# Altium PCB ar_pcb.PcbDoc
Units mil, origin at the board's own origin, x right, y up, seen from the top; angles counter-clockwise.
Board outline 10000 x 3699.85 mil, 6 copper layers (Top Layer, Power, I2C, UART, Ground, Bottom Layer), stack 32.112 mil thick; 11 components, 11 nets, 76 pads, 2 vias.
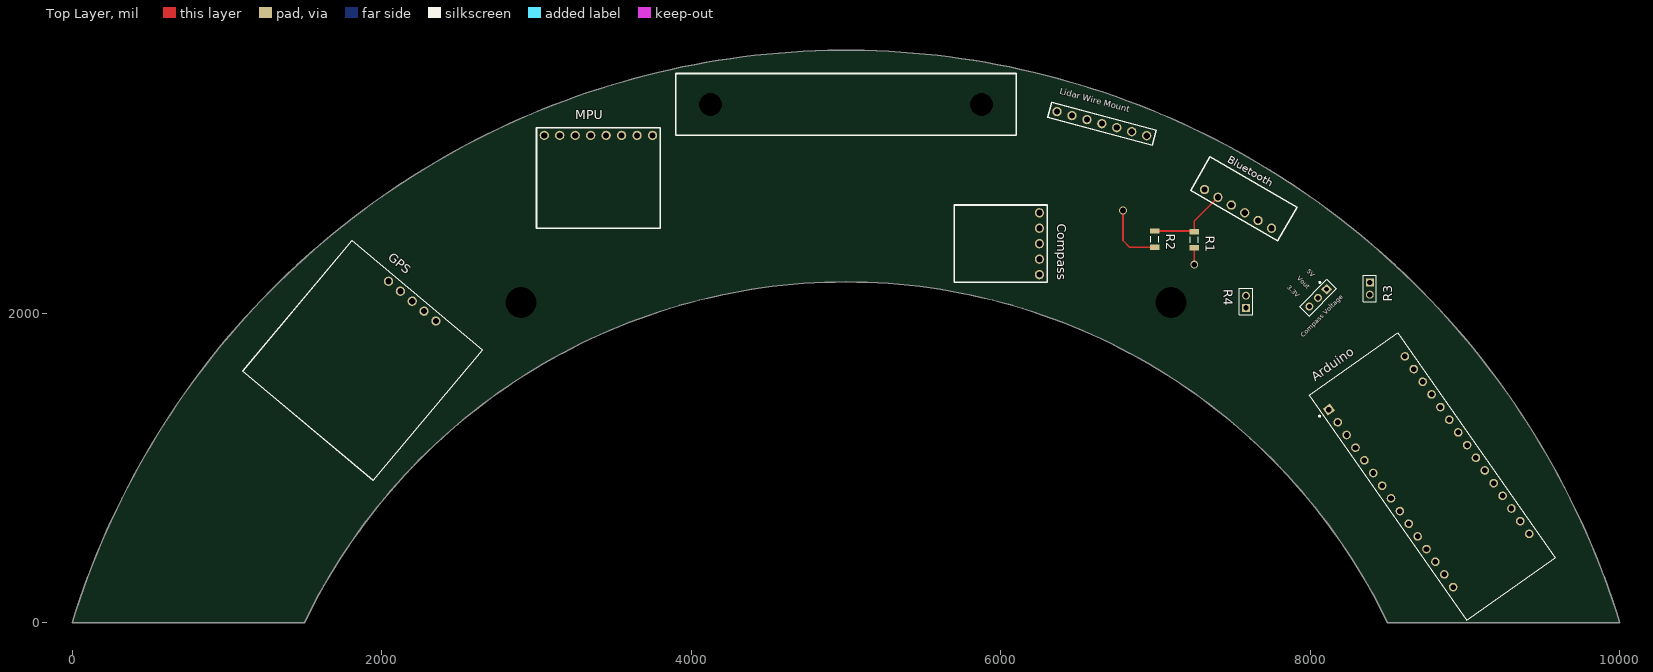
[diagram p0: Top Layer view]
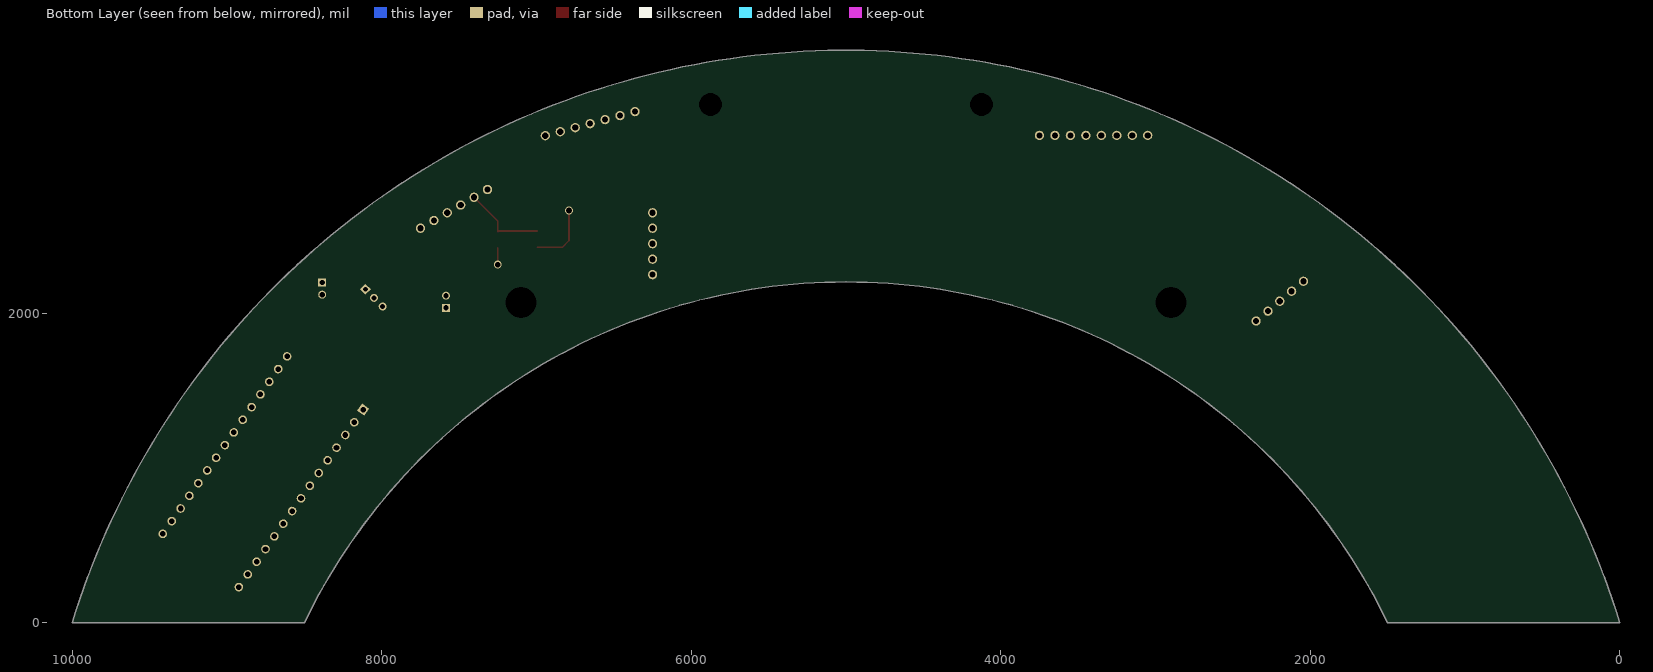
[diagram p1: Bottom Layer view, seen from below]
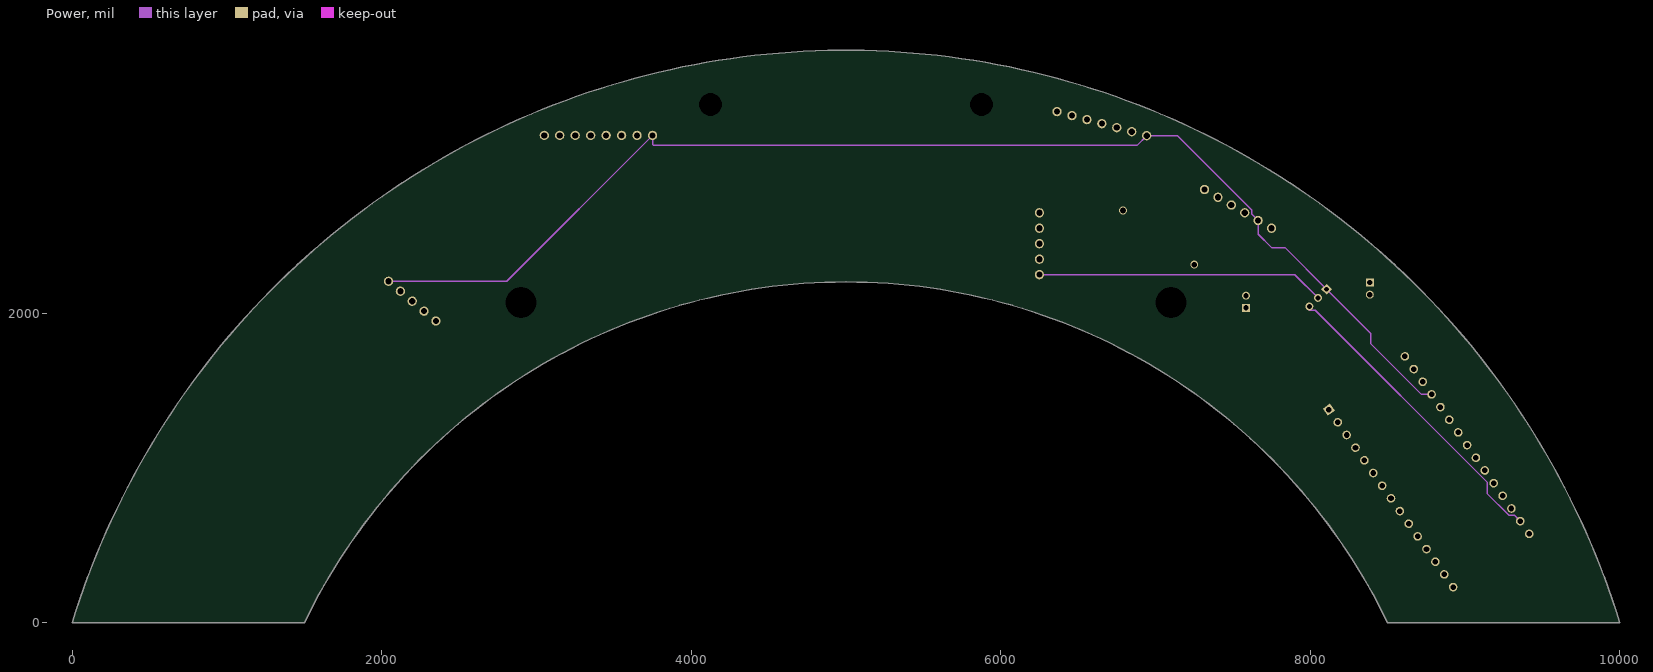
[diagram p2: Power]
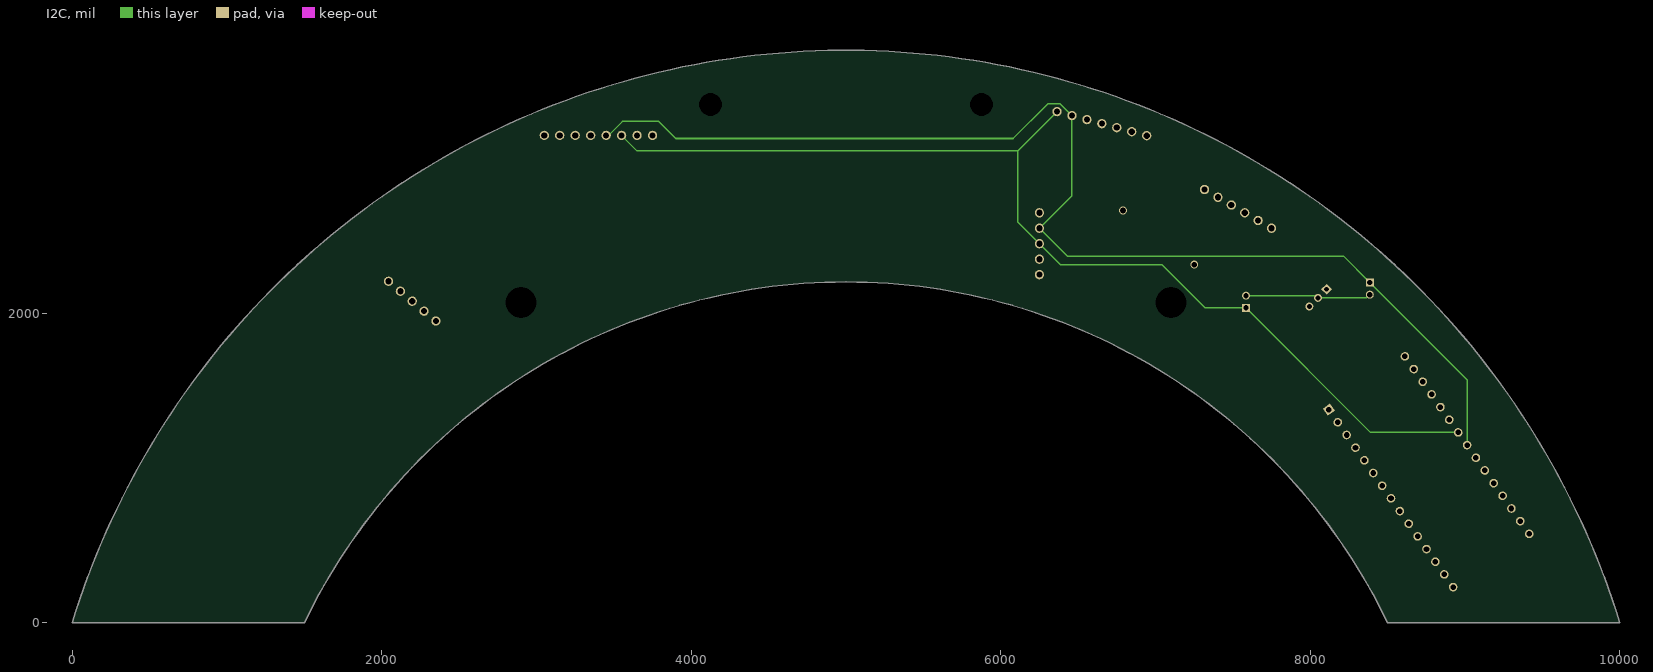
[diagram p3: I2C]
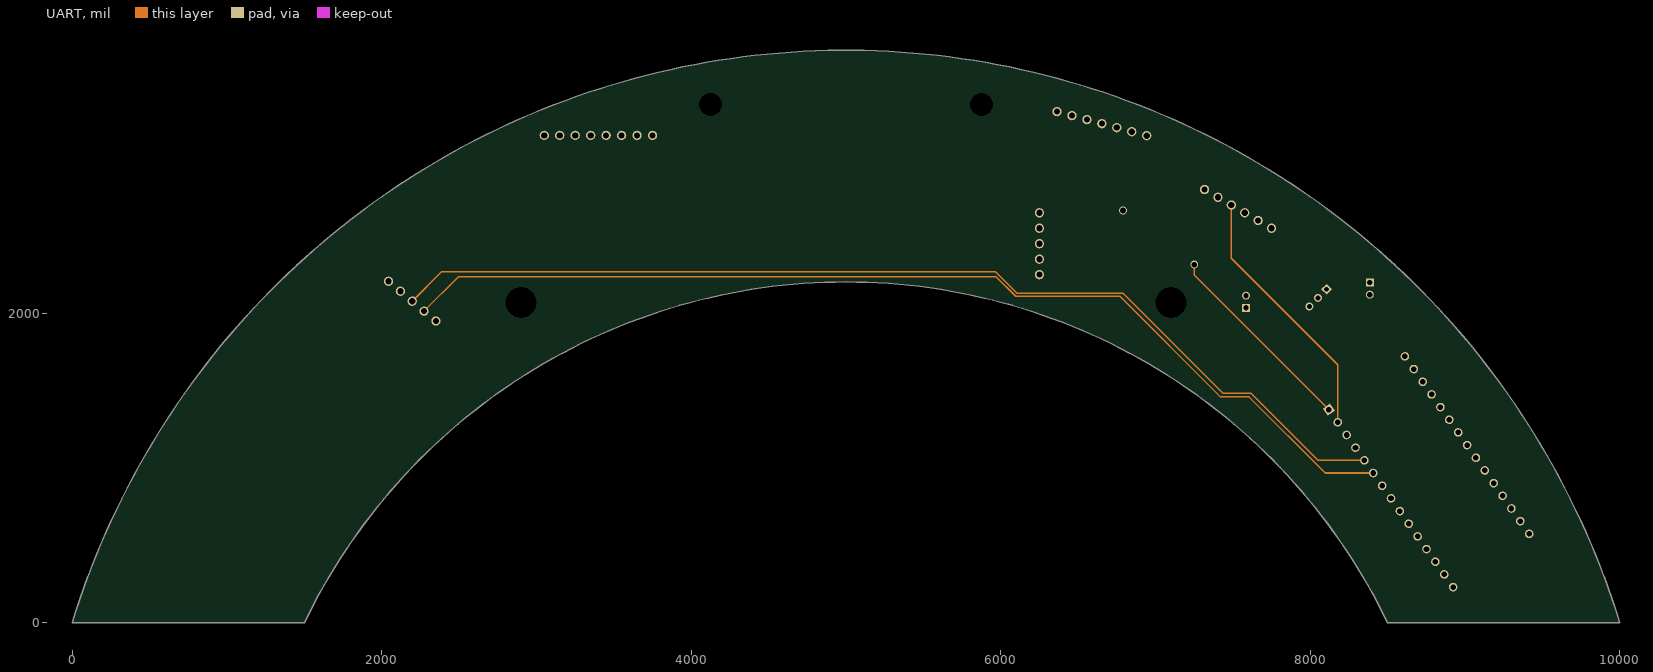
[diagram p4: UART]
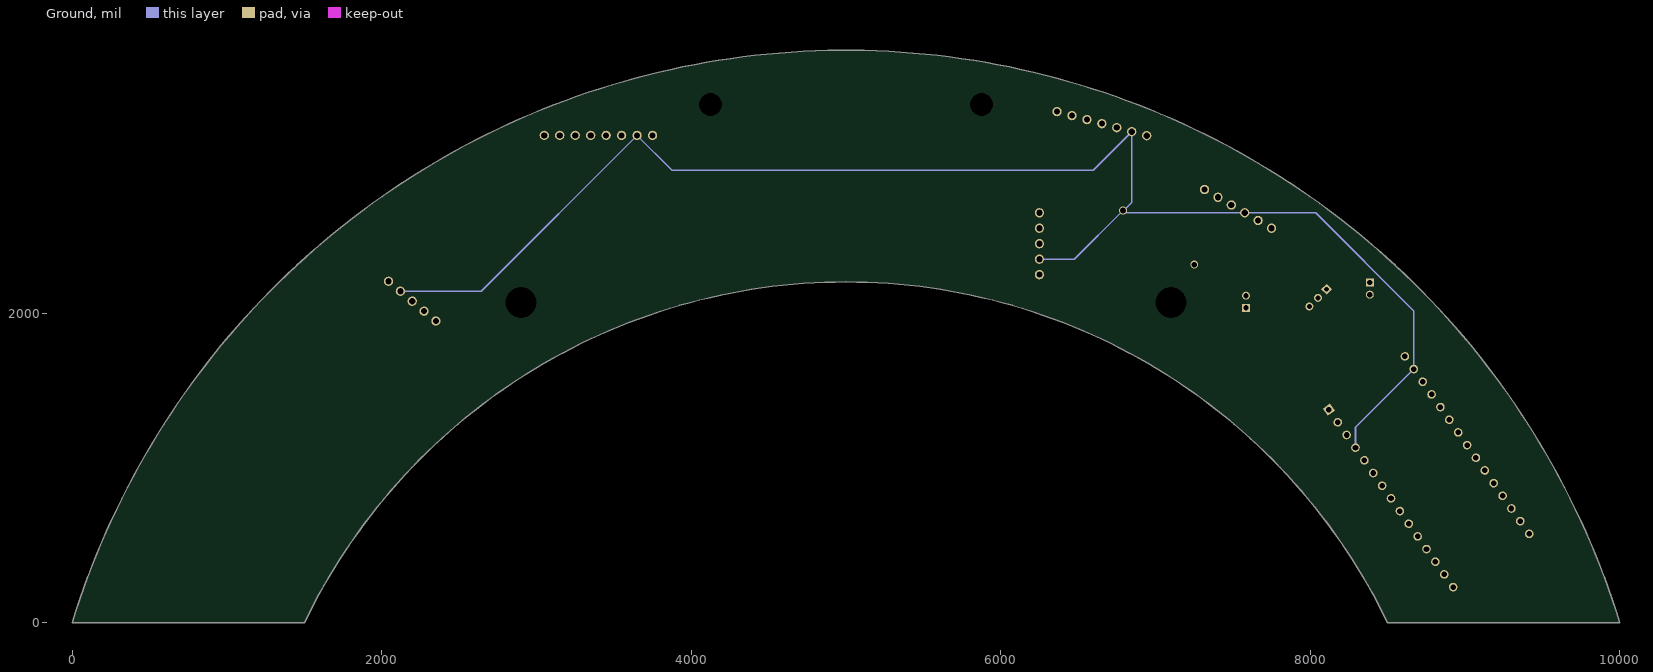
[diagram p5: Ground]

## Layer stack, top to bottom
Top Solder: solder mask 0.4, Solder Resist, Dk 3.5
Top Layer: signal copper 1.4
Dielectric 2: prepreg 2.8, PP-006, Dk 4.1
Power: signal copper 1.378
Dielectric 4: prepreg 2.8, PP-006, Dk 4.1
I2C: signal copper 1.378
Dielectric 1: dielectric 12.6, FR-4, Dk 4.8
UART: signal copper 1.378
Dielectric 5: prepreg 2.8, PP-006, Dk 4.1
Ground: signal copper 1.378
Dielectric 3: prepreg 2.8, PP-006, Dk 4.1
Bottom Layer: signal copper 1.4
Bottom Solder: solder mask 0.4, Solder Resist, Dk 3.5

## Board outline
0,0 1500,0 cw(c5000,-1678.98) 8500,0 10000,0 ccw(c5000,-1528.38)

## Design rules (kind name [scope] priority, off if disabled: settings)
Clearance [All] p1: gap=10 ignorepadtopadclearanceinfootprint=FALSE except(0: Arc-Hole Track-Hole SMDPad-Hole THPad-Hole Via-Hole Fill-Hole Poly-Hole Region-Hole Text-Hole)
PolygonConnect [All] p1: connectstyle=Relief reliefconductorwidth=10 reliefentries=4 polygonreliefangle="90 Angle" airgapwidth=10
RoutingVias [All] p1: holewidth=40 width=50 viastyle="Through Hole" minholewidth=28 minwidth=38 maxholewidth=200 maxwidth=210
SolderMaskExpansion [All] p1: expansion=4 istentingtop=FALSE
Width [All] p1: maxlimit=10 minlimit=10 preferedwidth=10
30 further rules are at their usual default settings.

## Components (designator, comment, footprint, x,y, rotation, side; value= is the part's Value field where it differs from the comment)
Arduino "Comment" FP-A000005-MFG 8789.33,945.61 r35 top
Bluetooth "Comment" hm10-Footprint-1 7316.99,2800 r330 top
Compass "Electronic Compass" "Electronic Compass-Footprint-1" 6250,2650 r270 top
"Compass Voltage" "Comment" FP-M22-2010305-MFG 8050,2100 r225 top
GPS "Comment" "GT-U7 GPS Sensor-Footprint-1" 1870.56,2156.49 r320 top
"Lidar Wire Mount" "Comment" "SF11_C lidar module-Footprint-1" 6363.63,3303.53 r345 top
MPU "Comment" mpu6050-Footprint-1 3050,3150 r0 top
R1 "Resistor" RESC3216X70X50LL05T20 7250,2475 r270 top value=1K
R2 "Resistor" RESC3216X70X50LL05T20 6995,2480 r270 top
R3 "Resistor" FP-M22-2510205-MFG 8385,2160 r270 top
R4 "Resistor" FP-M22-2510205-MFG 7585,2075 r90 top

## Footprints (in the part's own frame and the unit in brackets; to place one, negate y for a bottom-side part, rotate by r counter-clockwise, add the part's x,y. Pads: shape width x height; smd on the part's side, far side on the other; paste and mask are expansions set on the pad)
"Electronic Compass-Footprint-1" [mil]
  round 60 hole 40: 1(400,0) 2(300,0) 3(200,0) 4(100,0) 5(0,0)
  silkscreen extent -50,-550 450,50
FP-A000005-MFG [mil]
  rect 55.67x55.67 hole 35.98 paste-39370.1 mask+0: 1(-300,737.5)
  round 55.67 hole 35.98 paste-39370.1 mask+0: 2(-300,637.5) 3(-300,537.5) 4(-300,437.5) 5(-300,337.5) 6(-300,237.5) 7(-300,137.5) 8(-300,37.5) 9(-300,-62.5) 10(-300,-162.5) 11(-300,-262.5) 12(-300,-362.5) 13(-300,-462.5) 14(-300,-562.5) 15(-300,-662.5) 16(300,-662.5) 17(300,-562.5) 18(300,-462.5) 19(300,-362.5) 20(300,-262.5) 21(300,-162.5) 22(300,-62.5) 23(300,37.5) 24(300,137.5) 25(300,237.5) 26(300,337.5) 28(300,537.5) 29(300,637.5) 30(300,737.5)
  round 55.67 hole 35.98 mask+4: 27(300,437.5)
  silkscreen extent -379,-888 350,887, body extent -354,-891 354,891, height 10
FP-M22-2010305-MFG [mm]
  rect 1.3x1.3 hole 0.8 paste-1000 mask+0: 1(-2,0)
  round 1.3 hole 0.8 paste-1000 mask+0: 2(0,0) 3(2,0)
  silkscreen extent -3.18,-1.7 3.18,1.1, body extent -3.28,-1.2 3.28,1.2, height 0.25
FP-M22-2510205-MFG [mm]
  rect 1.3x1.3 hole 0.889 paste-1000 mask+0: 1(-1,0)
  round 1.3 hole 0.889 paste-1000 mask+0: 2(1,0)
  silkscreen extent -2.18,-1.1 2.18,1.1, body extent -2.27,-1.2 2.27,1.2, height 0.25
"GT-U7 GPS Sensor-Footprint-1" [mil]
  round 60 hole 40: 1(100,150) 2(200,150) 3(300,150) 4(400,150) 5(500,150)
  silkscreen extent -250,-900 850,200
hm10-Footprint-1 [mil]
  round 60 hole 40: 1(0,0) 2(100,0) 3(200,0) 4(300,0) 5(400,0) 6(500,0)
  silkscreen extent -75,-50 575,200
mpu6050-Footprint-1 [mil]
  round 60 hole 40: 1(700,0) 2(600,0) 3(500,0) 4(400,0) 5(300,0) 6(200,0) 7(100,0) 8(0,0)
  silkscreen extent -50,-600 750,50
RESC3216X70X50LL05T20 [mm] "Chip Resistor, 2-Leads, Body 3.20x1.60mm, IPC High Density"
  rect 0.9x1.55 smd: 1(-1.325,0) 2(1.325,0)
  silkscreen extent -0.5,-0.67 0.5,0.67, body extent -1.63,-0.82 1.62,0.82, height 0.7
"SF11_C lidar module-Footprint-1" [mil]
  round 60 hole 40: 1(0,0) 2(100,0) 3(200,0) 4(300,0) 5(400,0) 6(500,0) 7(600,0)
  silkscreen extent -50,-50 650,50

## Part data
Arduino: library part CMP-189986-000002-1, "ARDUINO NANO ATMEGA328 EVAL BRD", Operating Supply Voltage=12V, Package Quantity=50, Core Architecture=AVR, Data Bus Width=8b, Evaluation Kit=Yes, Height=0.25inch, Interface=I2C, Length=7inch, Number of Bits=8, Packaging=Bulk, REACH SVHC="No SVHC", Series="AVR® ATmega", Weight=0.358383oz, Width=5inch
Bluetooth: library part HM10-BLE-module-2, "HM10-BLE module"
Compass: library part CMP-00030-00001-4, "Electronic Compass GY271 HMC5883L"
"Compass Voltage": library part CMP-15831-000100-1, "CONN HEADER VERT 3POS 2MM", Case/Package=SIL, Color=Black, Contact Resistance=20mR, Current Rating=1A, Flammability Rating="UL94 V-0", Insulation Resistance=10GR, Max Operating Temperature=105°C, Min Operating Temperature=-55°C, Package Quantity=1000, Voltage Rating=650V, Voltage Rating (AC)=250V, Connector Type="Male Pin", Contact Finish - Mating=GOLD, Contact Material=Bronze, Contact Mating Length=0.138inch, Contact Plating=Gold, Contact Shape=Square, Contact Type="Male Pin", Depth=2mm, Fastening Type=Pull, Housing Color=Black, Housing Material=Nylon, Insulation Color=Black, Insulation Material=Nylon, Lead Pitch=2mm, Length=6mm, Mated Stacking Heights=8.6mm, Max Current Rating=1A, Mount="Through Hole", Number of Contacts=3, Number of Positions=3, Number of Rows=1, Orientation=Straight, Packaging=Bulk, Pitch=2mm, Radiation Hardening=No, Reach SVHC Compliant=Yes, RoHS Compliant=Yes, Series=M22, Termination=Solder, Working Voltage=250V
GPS: library part CMP-00030-00005-4, "GPS sensor"
"Lidar Wire Mount": library part SF11/C-3, "SF11/C lidar module"
MPU: library part MPU6050-throughhole-4, "MPU-6050 through hole"
R1: SimulationGenericComponent=True, TC1=0, TC2=0
R2: R1=2K, SimulationGenericComponent=True, TC1=0, TC2=0
R3: R1=2.2K, SimulationGenericComponent=True, TC1=0, TC2=0
R4: R4=2.2K, SimulationGenericComponent=True, TC1=0, TC2=0

## Free pads (board coordinates)
  round 60 hole 150 mask+1: 1(4125,3350) 1(5875,3350)
  round 60 hole 200: 2(7100,2069) 3(2900,2069)

## Via types
v1: diameter 50, hole 40, Top Layer to Bottom Layer, 1 vias
v2: diameter 50, hole 35, Top Layer to Bottom Layer, 1 vias

## Nets (pads, with @x,y where several pads share a name; then routed paths per layer and width w, separated by ;. In a path a pad name is that pad's centre, name@x,y a point inside that pad or via, vN(x,y) a via of type N, cw(c..) or ccw(c..) an arc to the next point about the centre after c; other vN are vias at no path point)
GND: "Lidar Wire Mount.6" Arduino.4 Arduino.29 Bluetooth.4 Compass.2 GPS.2 MPU.2 R2.2 | length 10151.6
  Top Layer w10: v1(6790,2665) 6790,2470 6832.17,2427.83 R2.2
  Ground w10: GPS.2 2642.84,2142.84 MPU.2 3875,2925 6597.47,2925 6846.59,3174.12 6846.59,2716.59 6795,2665 v1(6790,2665) ; Compass.2 6475,2350 v1(6790,2665) ; Arduino.4 8292.64,1263.12 Arduino.29 8669.42,2015.58 8035,2650 Bluetooth.4 6805,2650 v1(6790,2665)
NetArduino_1: Arduino.1 R1.2 | length 1405.8
  Top Layer w10: v2(7250,2315) R1.2
  UART w10: v2(7250,2315) 7250,2248.23 Arduino.1
NetArduino_2: Arduino.2 Bluetooth.3 | length 1689.1
  UART w10: Bluetooth.3 7490.19,2356.02 8177.93,1668.29 Arduino.2
NetArduino_5: Arduino.5 GPS.3 | length 6737.8
  UART w10: GPS.3 2388.23,2270 5965,2270 6105,2130 6790,2130 7435,1485 7615,1485 8050,1050 Arduino.5
NetArduino_6: Arduino.6 GPS.4 | length 6750.2
  UART w10: GPS.4 2494.12,2235 5971.72,2235 6096.72,2110 6770,2110 7420,1460 7605,1460 8096.92,968.08 Arduino.6
NetArduino_17: "Compass Voltage.3" Arduino.17 | length 1995.3
  Power w10: 7994.32,2044.32 7994.32,2020.3 8031.97,2020.3 9142.8,909.47 9142.8,835.8 9282.61,695.99 9318.63,695.99 Arduino.17
NetArduino_23: "Lidar Wire Mount.2" Arduino.23 Compass.4 MPU.4 R3.1 | length 7624.6
  I2C w10: MPU.4 3465,3150 3555,3240 3790,3240 3900,3130 6080,3130 6305,3355 6382.87,3355 6460.22,3277.65 6460.22,2760.22 Compass.4 6430,2370 8214.37,2370 R3.1 9013.56,1570.81 Arduino.23
NetArduino_24: "Lidar Wire Mount.1" Arduino.24 Compass.3 MPU.3 R4.1 | length 6829.5
  I2C w10: MPU.3 3650.1,3049.9 6110,3049.9 ; 6363.63,3303.53 6110,3049.9 ; Arduino.24 8390.31,1230.32 R4.1 7319.37,2035.63 7040,2315 6385,2315 Compass.3 6110,2590 6110,3049.9
NetArduino_27: "Compass Voltage.1" "Lidar Wire Mount.7" Arduino.27 Bluetooth.5 GPS.1 MPU.1 | length 8016.9
  Power w10: GPS.1 2807.11,2207.11 MPU.1 3751.76,3148.24 3751.76,3090.91 3757.62,3085.05 6880,3085.05 6943.19,3148.24 7142.2,3148.24 7621.79,2668.64 7621.79,2641.6 Bluetooth.5 7663.4,2511.6 7750,2425 7836.36,2425 8105.68,2155.68 8390,1871.36 8390,1805 8718.94,1476.06 Arduino.27
NetBluetooth_2: Bluetooth.2 R1.1 R2.1 | length 543.5
  Top Layer w10: R2.1 7245,2532.17 R1.1 7250,2596.41 Bluetooth.2
"NetCompass Voltage_2": "Compass Voltage.2" Compass.1 R3.2 R4.2 | length 2676.6
  Power w10: Compass.1 7900,2250 8050,2100
  I2C w10: R4.2 8035.63,2114.37 8050,2100 8364.37,2100 R3.2
pads on no net: "Lidar Wire Mount.3" "Lidar Wire Mount.4" "Lidar Wire Mount.5" Arduino.3 Arduino.7 Arduino.8 Arduino.9 Arduino.10 Arduino.11 Arduino.12 Arduino.13 Arduino.14 Arduino.15 Arduino.16 Arduino.18 Arduino.19 Arduino.20 Arduino.21 Arduino.22 Arduino.25 Arduino.26 Arduino.28 Arduino.30 Bluetooth.1 Bluetooth.6 Compass.5 GPS.5 MPU.5 MPU.6 MPU.7 MPU.8

## Silkscreen, mask and mechanical layers (free items; w line width, h text height)
Top Overlay:
  lines w10: 3900,3150 6100,3150 6100,3550 3900,3550 3900,3150
  text "5V" at 7974.14,2270 h30 r315
  text "Vout" at 7914.14,2225 h30 r315
  text "3.3V" at 7849.14,2165 h30 r315
Drill Drawing:
  circle w10: c100.62,5510.83 r33.33
  lines w10: 67.29,4794.17 133.96,4794.17 100.62,4727.5 67.29,4794.17 ; 67.29,4877.5 133.96,4877.5 133.96,4944.17 67.29,4944.17 67.29,4877.5 ; 67.29,5044.17 83.96,5044.17 83.96,5027.5 117.29,5027.5 117.29,5044.17 133.96,5044.17 133.96,5077.5 117.29,5077.5 117.29,5094.17 83.96,5094.17 83.96,5077.5 67.29,5077.5 67.29,5044.17 ; 67.29,5177.5 100.62,5194.17 133.96,5177.5 117.29,5210.83 133.96,5244.17 100.62,5227.5 67.29,5244.17 83.96,5210.83 67.29,5177.5 ; 67.29,5344.17 83.96,5344.17 100.62,5327.5 117.29,5344.17 133.96,5344.17 117.29,5360.83 133.96,5377.5 117.29,5377.5 100.62,5394.17 83.96,5377.5 67.29,5377.5 83.96,5360.83 67.29,5344.17
  lines w15: 7.5,4682.5 10968.44,4682.5 ; 7.5,5582.5 10968.44,5582.5 ; 558.38,4532.5 558.38,5732.5 ; 1098.24,4532.5 1098.24,5732.5 ; 2257.9,4532.5 2257.9,5732.5 ; 2763.77,4532.5 2763.77,5732.5 ; 3497.57,4532.5 3497.57,5732.5 ; 4997.13,4532.5 4997.13,5732.5 ; 5586.97,4532.5 5586.97,5732.5 ; 6332.77,4532.5 6332.77,5732.5 ; 7402.46,4532.5 7402.46,5732.5 ; 8256.22,4532.5 8256.22,5732.5 ; 9589.83,4532.5 9589.83,5732.5 ; 7.5,4532.5 10968.44,4532.5 10968.44,5732.5 7.5,5732.5 7.5,4532.5
  text "Symbol" at 97.5,5627.5 h72
  text "Count" at 603.38,5627.5 h72
  text "Hole Size" at 1143.24,5627.5 h72
  text "Plated" at 2302.9,5627.5 h72
  text "Hole Type" at 2808.77,5627.5 h72
  text "Drill Layer Pair" at 3542.57,5627.5 h72
  text "Via/Pad" at 5042.13,5627.5 h72
  text "Pad Shape" at 5631.97,5627.5 h72
  text "Template" at 6377.77,5627.5 h72
  text "Description" at 7447.46,5627.5 h72
  text "Hole Tolerance (+)" at 8301.22,5627.5 h72
  text "Hole Tolerance (-)" at 9634.83,5627.5 h72
  text "2" at 603.38,5477.5 h60
  text "150.00mil (3.810mm)" at 1143.24,5477.5 h60
  text "PTH" at 2302.9,5477.5 h60
  text "Round" at 2808.77,5477.5 h60
  text "Top Layer - Bottom Layer" at 3542.57,5477.5 h60
  text "Pad" at 5042.13,5477.5 h60
  text "Rounded" at 5631.97,5477.5 h60
  text "c152h381m155mx154" at 6377.77,5477.5 h60
  text "2" at 603.38,5327.5 h60
  text "200.00mil (5.080mm)" at 1143.24,5327.5 h60
  text "PTH" at 2302.9,5327.5 h60
  text "Round" at 2808.77,5327.5 h60
  text "Top Layer - Bottom Layer" at 3542.57,5327.5 h60
  text "Pad" at 5042.13,5327.5 h60
  text "Rounded" at 5631.97,5327.5 h60
  text "c152h508" at 6377.77,5327.5 h60
  text "3" at 603.38,5177.5 h60
  text "31.50mil (0.800mm)" at 1143.24,5177.5 h60
  text "PTH" at 2302.9,5177.5 h60
  text "Round" at 2808.77,5177.5 h60
  text "Top Layer - Bottom Layer" at 3542.57,5177.5 h60
  text "Pad" at 5042.13,5177.5 h60
  text "(Mixed)" at 5631.97,5177.5 h60
  text "(Mixed)" at 6377.77,5177.5 h60
  text "5" at 603.38,5027.5 h60
  text "35.00mil (0.889mm)" at 1143.24,5027.5 h60
  text "PTH" at 2302.9,5027.5 h60
  text "Round" at 2808.77,5027.5 h60
  text "Top Layer - Bottom Layer" at 3542.57,5027.5 h60
  text "(Mixed)" at 5042.13,5027.5 h60
  text "(Mixed)" at 5631.97,5027.5 h60
  text "(Mixed)" at 6377.77,5027.5 h60
  text "30" at 603.38,4877.5 h60
  text "35.98mil (0.914mm)" at 1143.24,4877.5 h60
  text "PTH" at 2302.9,4877.5 h60
  text "Round" at 2808.77,4877.5 h60
  text "Top Layer - Bottom Layer" at 3542.57,4877.5 h60
  text "Pad" at 5042.13,4877.5 h60
  text "(Mixed)" at 5631.97,4877.5 h60
  text "(Mixed)" at 6377.77,4877.5 h60
  text "32" at 603.38,4727.5 h60
  text "40.00mil (1.016mm)" at 1143.24,4727.5 h60
  text "PTH" at 2302.9,4727.5 h60
  text "Round" at 2808.77,4727.5 h60
  text "Top Layer - Bottom Layer" at 3542.57,4727.5 h60
  text "(Mixed)" at 5042.13,4727.5 h60
  text "Rounded" at 5631.97,4727.5 h60
  text "(Mixed)" at 6377.77,4727.5 h60
  text "74 Total" at 603.38,4577.5 h60